# Altium PCB PCB1.PcbDoc
Units mil, origin at the board's own origin, x right, y up, seen from the top; angles counter-clockwise.
Board outline 1075 x 1410 mil, 2 copper layers (Top Layer, Bottom Layer); 4 components, 9 nets, 26 pads, 0 vias.
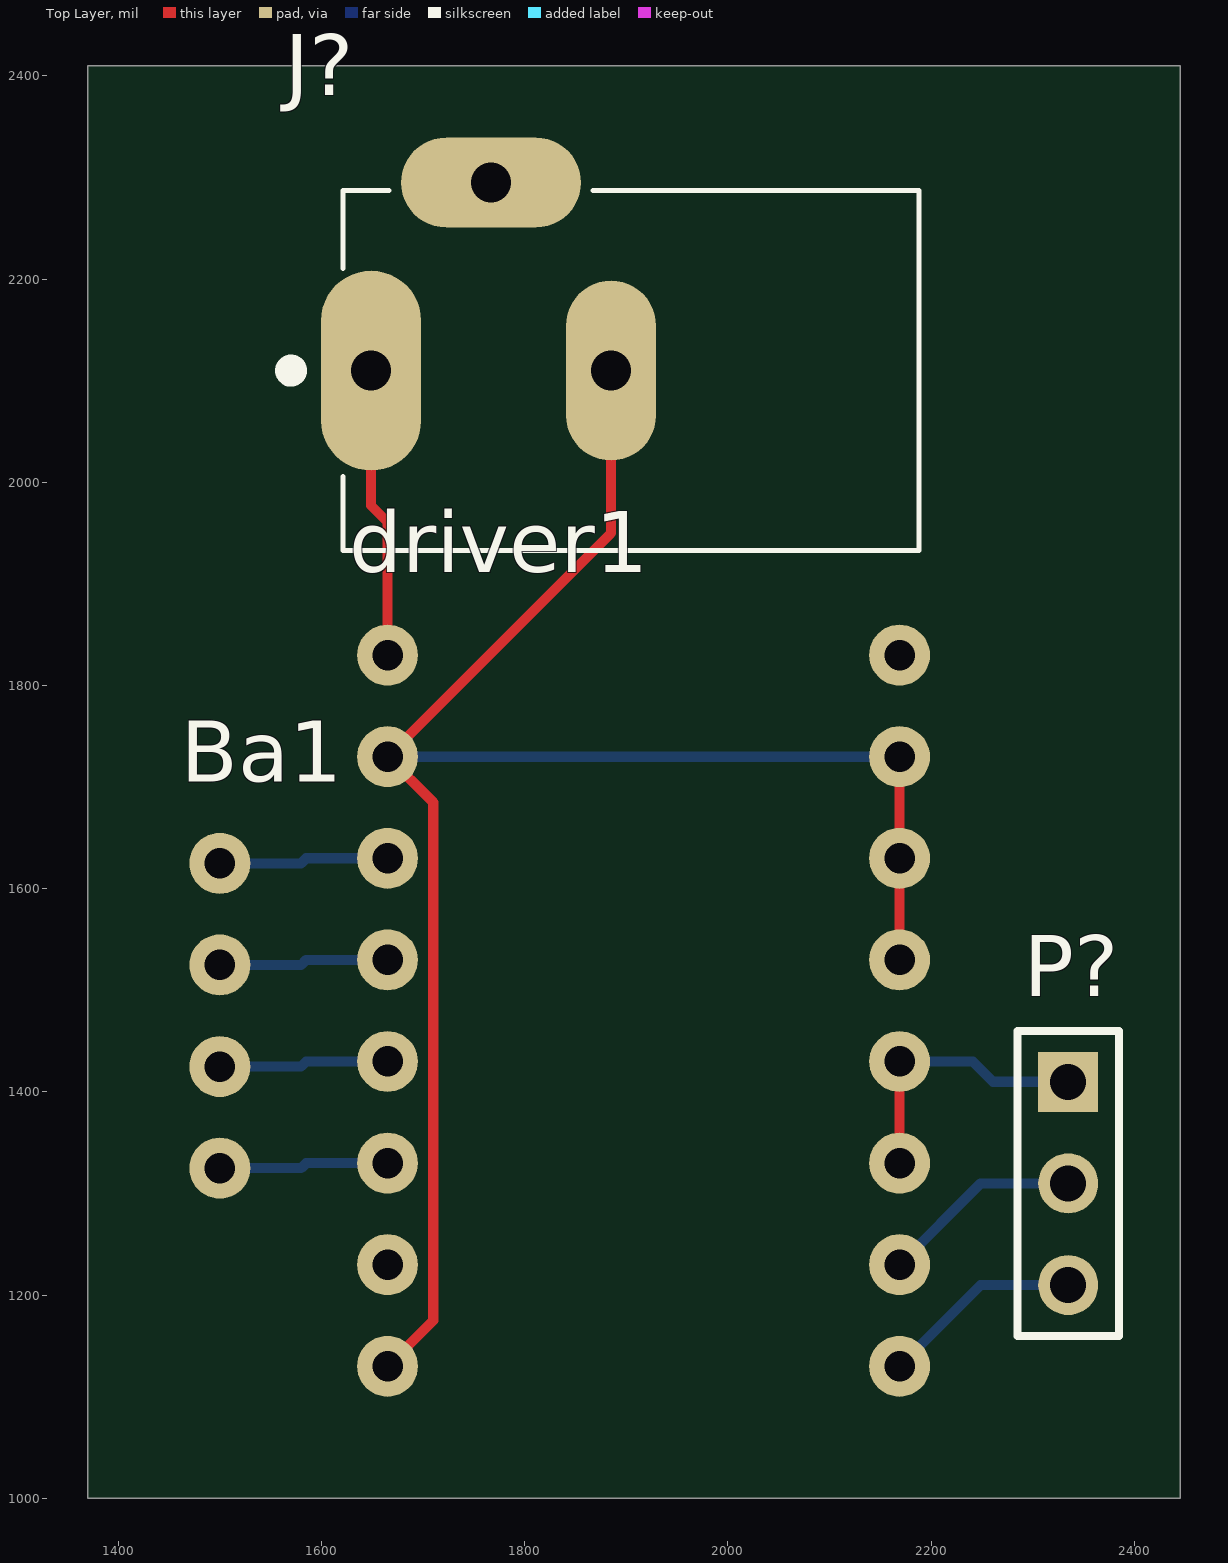
[diagram p0: Top Layer view]
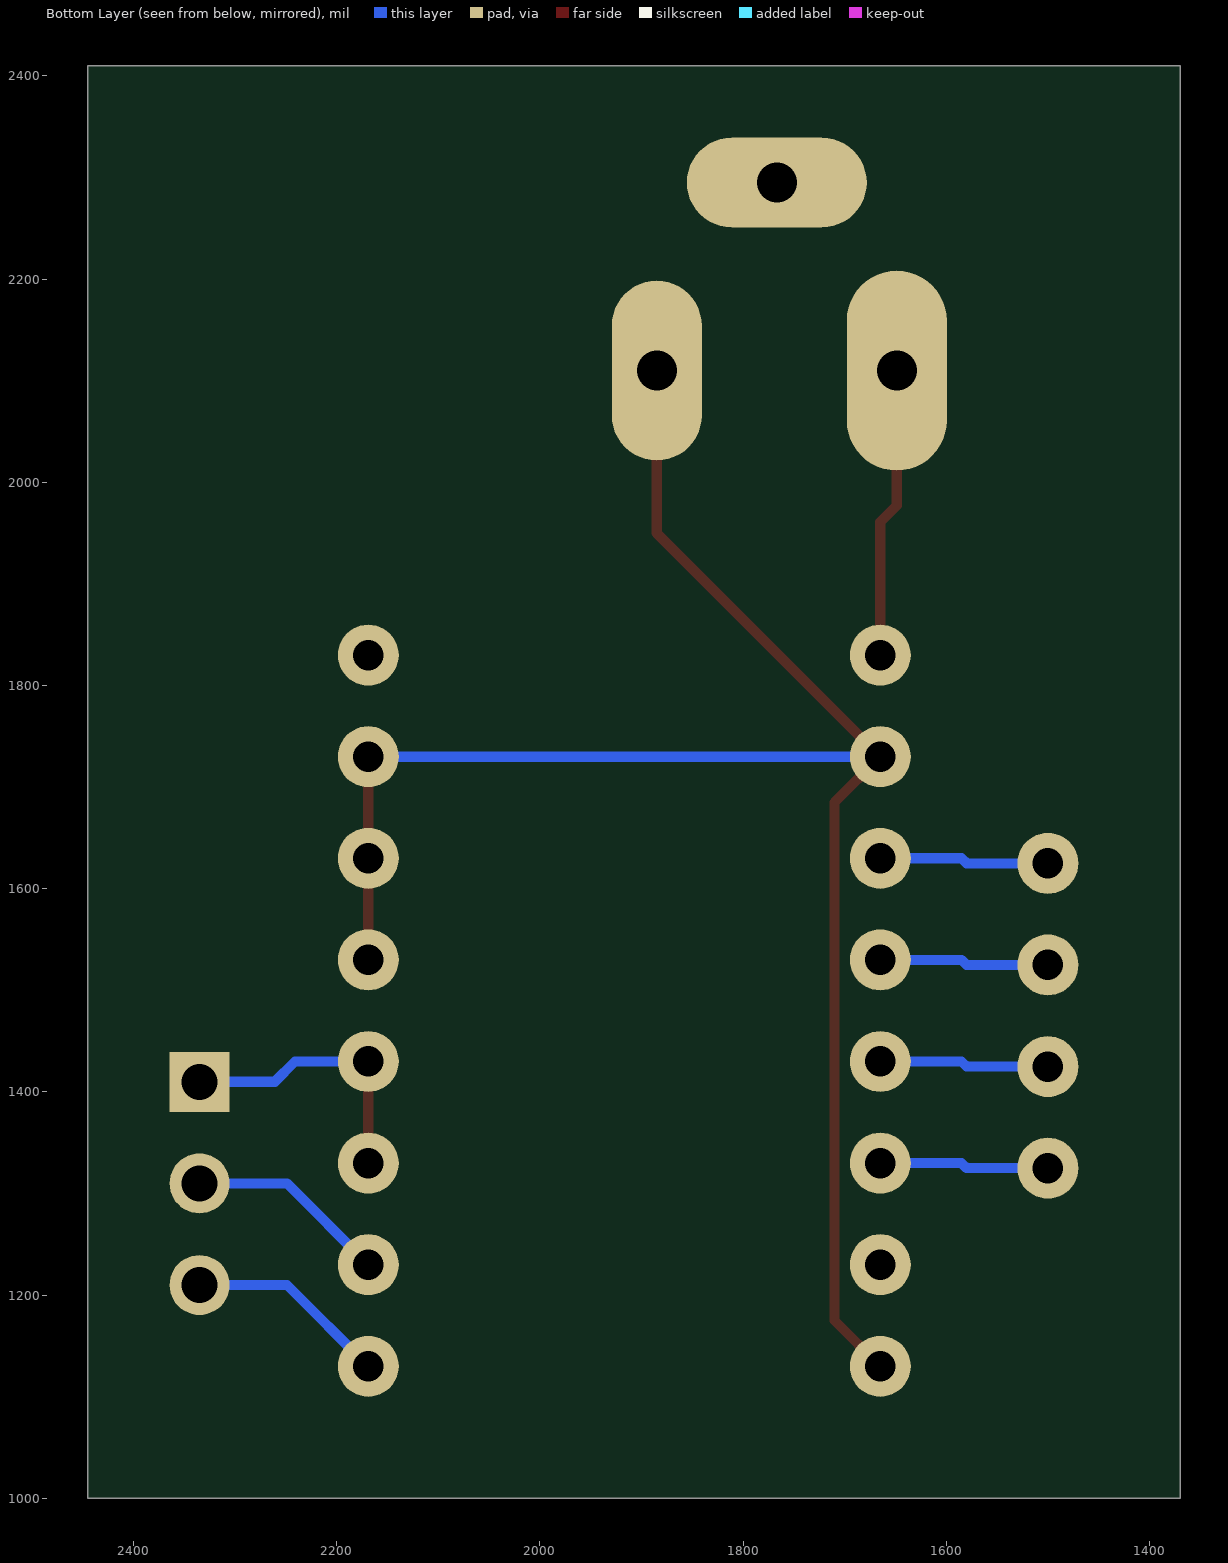
[diagram p1: Bottom Layer view, seen from below]

## Layer stack, top to bottom
Top Solder: solder mask 0.4, Solder Resist, Dk 3.5
Top Layer: signal copper 1.4
Dielectric 1: dielectric 12.6, FR-4, Dk 4.8
Bottom Layer: signal copper 1.4
Bottom Solder: solder mask 0.4, Solder Resist, Dk 3.5

## Board outline
1370,1000 2445,1000 2445,2410 1370,2410

## Design rules (kind name [scope] priority, off if disabled: settings)
Clearance [All] p1: gap=10 ignorepadtopadclearanceinfootprint=FALSE except(0: Arc-Hole Track-Hole SMDPad-Hole THPad-Hole Via-Hole Fill-Hole Poly-Hole Region-Hole Text-Hole)
PolygonConnect [All] p1: connectstyle=Relief reliefconductorwidth=10 reliefentries=4 polygonreliefangle="90 Angle" airgapwidth=10
RoutingVias [All] p1: holewidth=28 width=50 viastyle="Through Hole" minholewidth=28 minwidth=50 maxholewidth=28 maxwidth=50
SolderMaskExpansion [All] p1: expansion=4
Width [All] p1: maxlimit=10 minlimit=10 preferedwidth=10
30 further rules are at their usual default settings.

## Components (designator, comment, footprint, x,y, rotation, side; value= is the part's Value field where it differs from the comment)
Ba1 "barramacho" barramacho 1500,1325 r90 top
driver1 "driver_drv8825" drive_drv8825 1665,1130 r90 top
J? "PJ-002A" *CUI_PJ-002A 1648.78,2110 r0 top
P? "Header 3" HDR1X3 2335,1410 r270 top

## Footprints (in the part's own frame and the unit in brackets; to place one, negate y for a bottom-side part, rotate by r counter-clockwise, add the part's x,y. Pads: shape width x height; smd on the part's side, far side on the other; paste and mask are expansions set on the pad)
*CUI_PJ-002A [mm]
  oval 2.5x5 hole 1: 1(0,0)
  oval 2.25x4.5 hole 1: 2(6,0)
  oval 4.5x2.25 hole 1: 3(3,4.7)
  silkscreen extent -2.2,-4.5 13.7,4.5
barramacho [mil]
  round 60 hole 30: 17(0,0) 18(100,0) 19(200,0) 20(300,0)
  body extent -50,-50 350,48, height 400
drive_drv8825 [mil]
  round 60 hole 30: 0(0,0) 1(100,0) 2(200,0) 3(300,0) 4(400,0) 5(500,0) 6(600,0) 7(700,0) 8(0,-503.94) 9(100,-503.94) 10(200,-503.94) 11(300,-503.94) 12(400,-503.94) 13(500,-503.94) 14(600,-503.94) 15(700,-503.94)
  body extent -49,-553 751,47, height 201
HDR1X3 [mm] "Connector; Header; 3 Position"
  rect 1.5x1.5 hole 0.9: 1(0,0)
  round 1.5 hole 0.9: 2(2.54,0) 3(5.08,0)
  silkscreen extent -1.27,-1.27 6.35,1.27

## Part data
Ba1: library part Ba?, "barra macho de 4 pinos"
P?: "Header, 3-Pin", LatestRevisionDate=17-Jul-2002, LatestRevisionNote="Re-released for DXP Platform.", Publisher="Altium Limited"

## Nets (pads, with @x,y where several pads share a name; then routed paths per layer and width w, separated by ;. In a path a pad name is that pad's centre, name@x,y a point inside that pad or via, vN(x,y) a via of type N, cw(c..) or ccw(c..) an arc to the next point about the centre after c; other vN are vias at no path point)
NetBa1_17: Ba1.17 driver1.2 | length 167.1
  Bottom Layer w10: Ba1.17 1580,1325 1585,1330 driver1.2
NetBa1_18: Ba1.18 driver1.3 | length 167.1
  Bottom Layer w10: Ba1.18 1580,1425 1585,1430 driver1.3
NetBa1_19: Ba1.19 driver1.4 | length 167.1
  Bottom Layer w10: Ba1.19 1580,1525 1585,1530 driver1.4
NetBa1_20: Ba1.20 driver1.5 | length 167.1
  Bottom Layer w10: Ba1.20 1580,1625 1585,1630 driver1.5
Netdriver1_0: driver1.0 driver1.6 driver1.12 driver1.13 driver1.14 J?.2 | length 1812.3
  Top Layer w10: driver1.0 1710,1175 1710,1685 driver1.6 1885,1950 J?.2 ; driver1.12 driver1.13 driver1.14
  Bottom Layer w10: driver1.6 driver1.14
Netdriver1_7: driver1.7 J?.1 | length 286.7
  Top Layer w10: J?.1 1648.78,1977.22 1665,1961 driver1.7
Netdriver1_8: driver1.8 P?.3 | length 199.2
  Bottom Layer w10: driver1.8 2248.94,1210 P?.3
Netdriver1_9: driver1.9 P?.2 | length 199.2
  Bottom Layer w10: driver1.9 2248.94,1310 P?.2
Netdriver1_10: driver1.10 driver1.11 P?.1 | length 274.3
  Top Layer w10: driver1.10 driver1.11
  Bottom Layer w10: driver1.11 2241,1430 2261,1410 P?.1
pads on no net: driver1.1 driver1.15 J?.3